# Altium PCB PCB1.PcbDoc (part 3 of 4)
Units mil, origin at the board's own origin, x right, y up, seen from the top; angles counter-clockwise.
Board outline 4724.41 x 4724.41 mil, 4 copper layers (Top Layer, GND, VCC, Bottom Layer); 291 components, 240 nets, 990 pads, 328 vias.
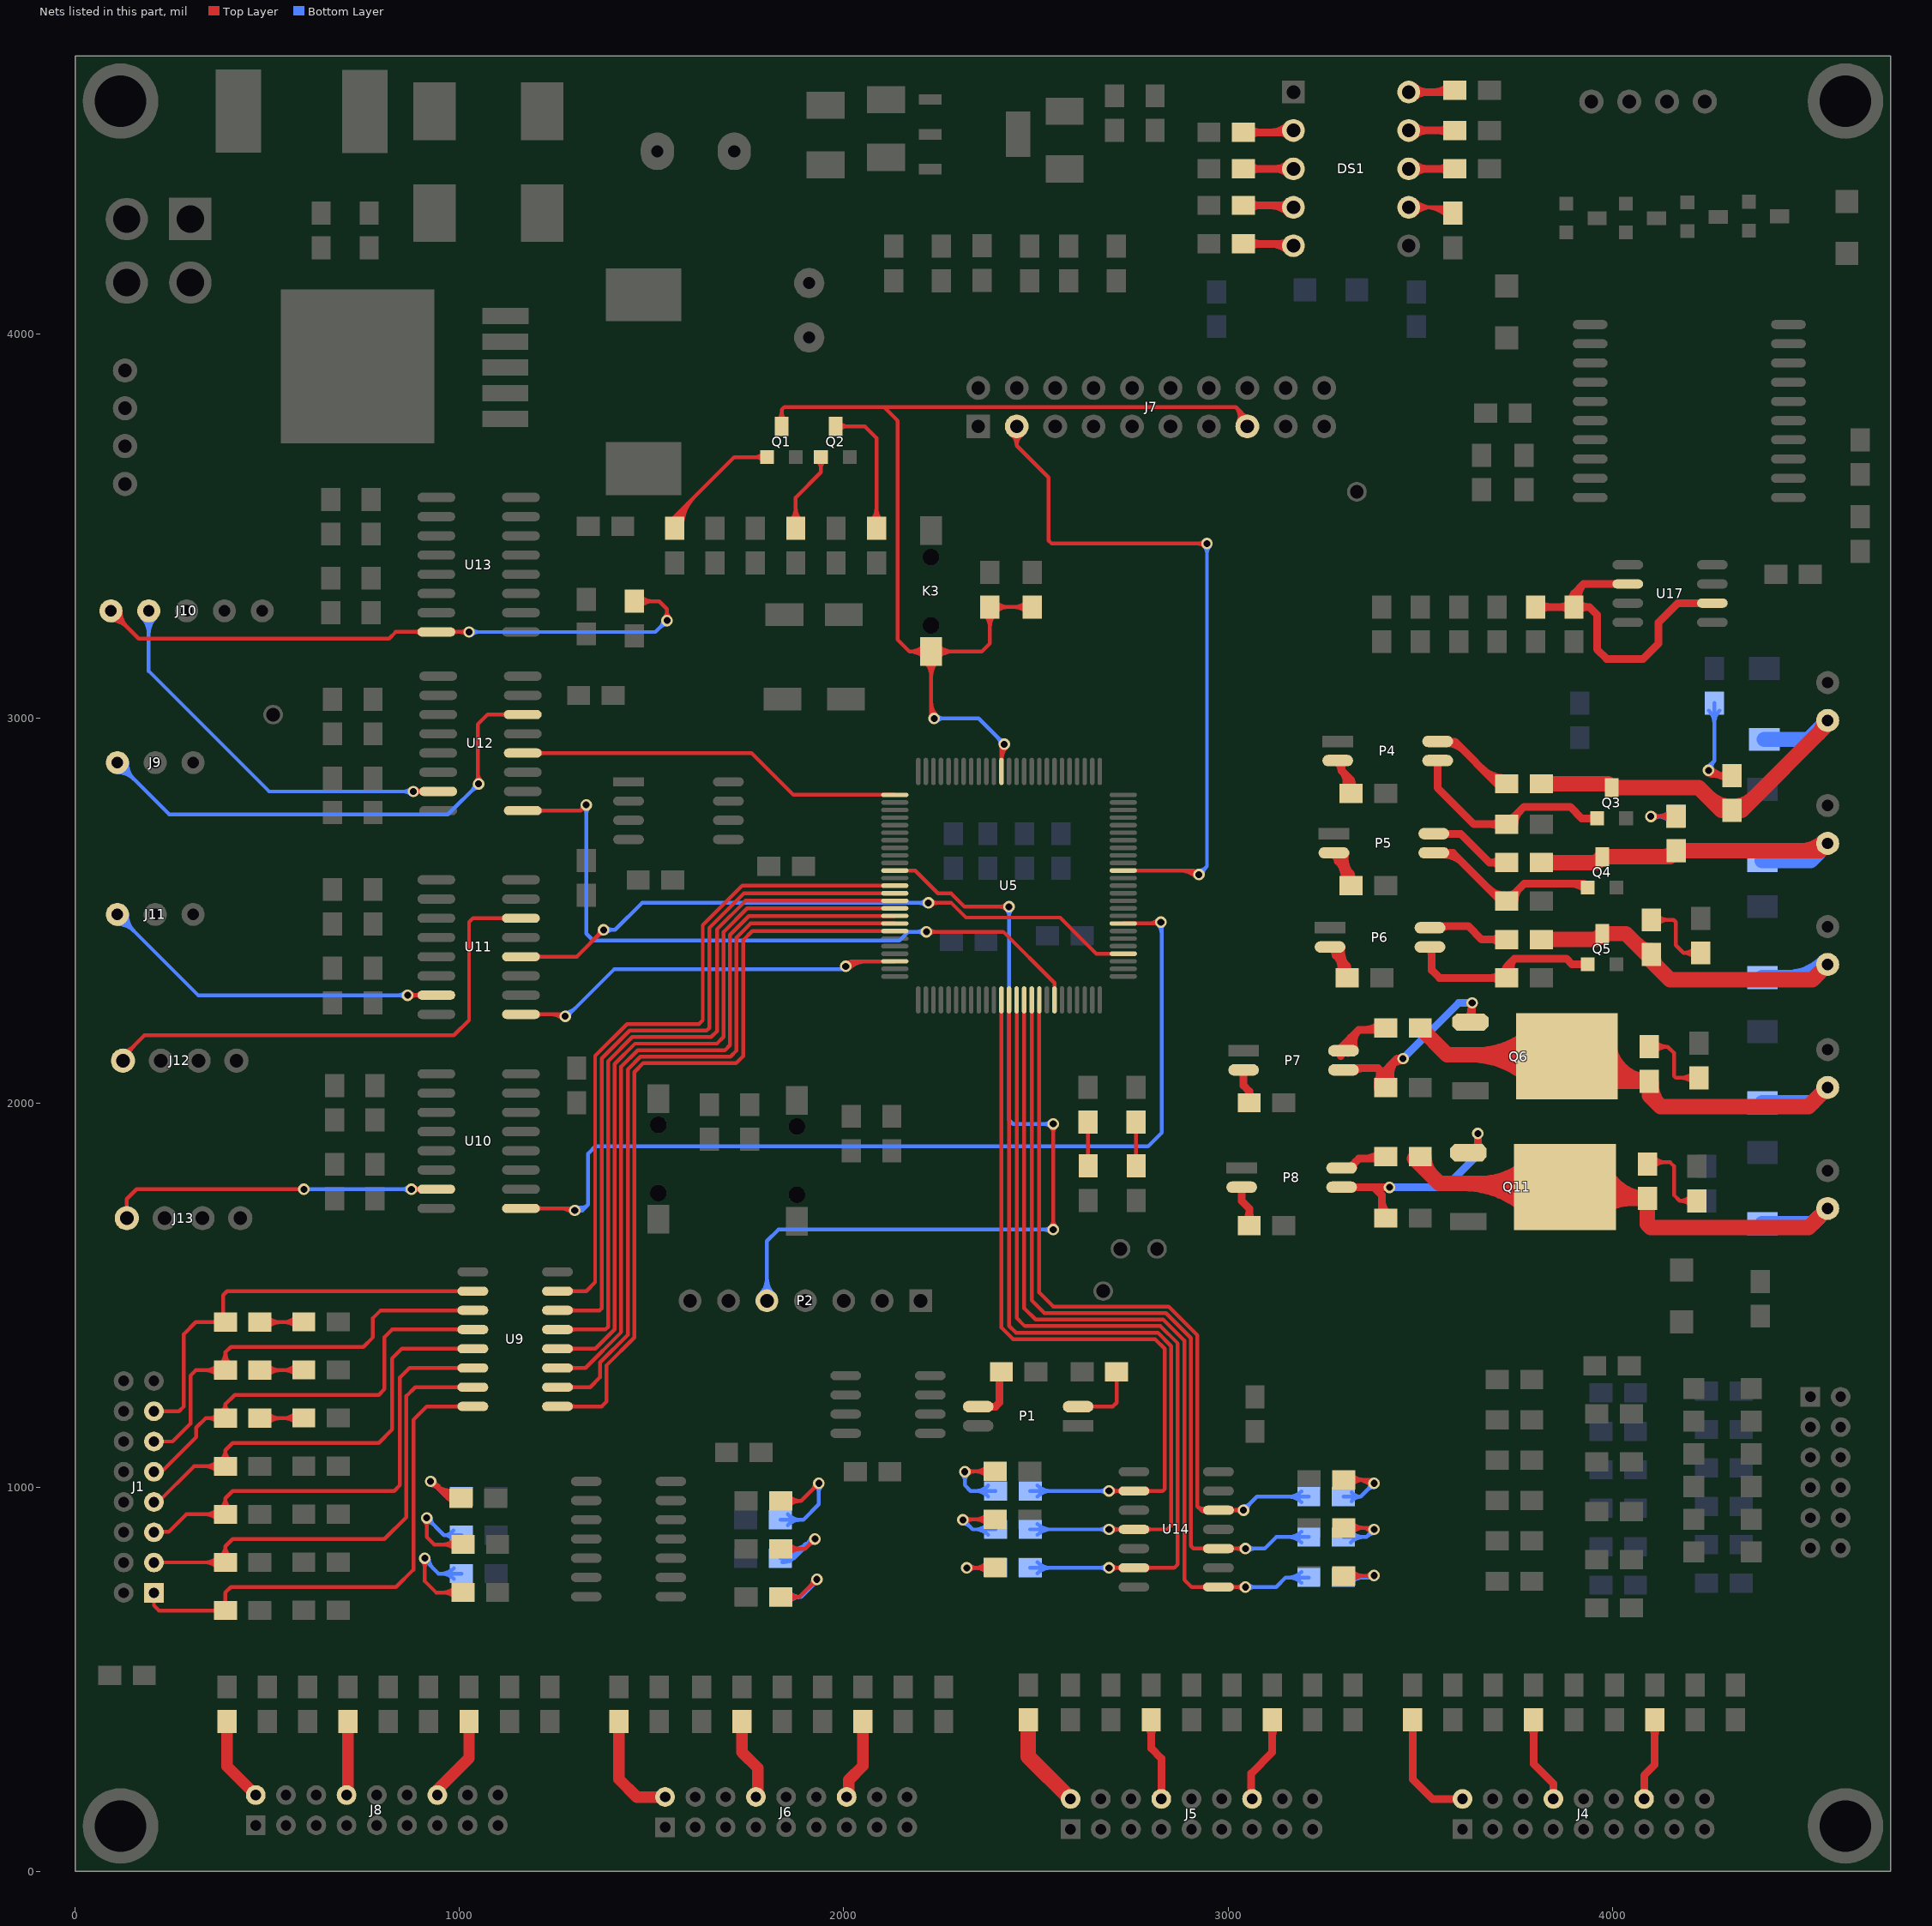
[diagram p5: the nets of this part, all layers, seen from the top]

## Via types
v1: diameter 30, hole 18, Top Layer to Bottom Layer, 301 vias
v2: diameter 35, hole 18, Top Layer to Bottom Layer, 22 vias
v3: diameter 50, hole 28, Top Layer to Bottom Layer, 4 vias
v4: diameter 28, hole 18, Top Layer to Bottom Layer, 1 vias

## Nets (pads, with @x,y where several pads share a name; then routed paths per layer and width w, separated by ;. In a path a pad name is that pad's centre, name@x,y a point inside that pad or via, vN(x,y) a via of type N, cw(c..) or ccw(c..) an arc to the next point about the centre after c; other vN are vias at no path point) (continued)
NetD19_1: D19.1 R53.1 | length 287.5
  Top Layer w10: D19.1@480.93,1179.09 594.09,1179.09 R53.1@595,1180 ; D19.1@500.07,1164.94 cw(c534.21,1130.8) 534.21,1179.09 cw(c534.21,1227.37) D19.1@500.07,1193.23 ; 539.51,1179.09 ccw(c539.51,1230.49) R53.1@575.86,1194.14 ; 543.92,1179.09 cw(c543.92,1133.92) R53.1@575.86,1165.86 ; 563.65,1179.09 ccw(c563.65,1206.35) R53.1@582.93,1187.07
NetD20_1: D20.1 R54.1 | length 287.5
  Top Layer w10: D20.1@480.93,1304.09 594.09,1304.09 R54.1@595,1305 ; D20.1@500.07,1289.94 cw(c534.21,1255.8) 534.21,1304.09 cw(c534.21,1352.37) D20.1@500.07,1318.23 ; 539.51,1304.09 ccw(c539.51,1355.49) R54.1@575.86,1319.14 ; 543.92,1304.09 cw(c543.92,1258.92) R54.1@575.86,1290.86 ; 563.65,1304.09 ccw(c563.65,1331.35) R54.1@582.93,1312.07
NetD21_1: D21.1 R55.1 | length 287.5
  Top Layer w10: D21.1@480.93,1429.09 594.09,1429.09 R55.1@595,1430 ; D21.1@500.07,1414.94 cw(c534.21,1380.8) 534.21,1429.09 cw(c534.21,1477.37) D21.1@500.07,1443.23 ; 539.51,1429.09 ccw(c539.51,1480.49) R55.1@575.86,1444.14 ; 543.92,1429.09 cw(c543.92,1383.92) R55.1@575.86,1415.86 ; 563.65,1429.09 ccw(c563.65,1456.35) R55.1@582.93,1437.07
NetD22_1: D22.1 R65.2 | length 414.4
  Top Layer w10: D22.1@3300.93,1019.09 3370.91,1019.09 v1(3380,1010) ccw(c3358.06,988.06) 3358.06,1019.09 ; D22.1@3320.07,1004.94 cw(c3354.21,970.8) 3354.21,1019.09 cw(c3354.21,1067.37) D22.1@3320.07,1033.23 ; 3333.92,1019.09 cw(c3333.92,963.92) v1@3372.93,1002.93
  Bottom Layer w10: R65.2@3300,975 3345,975 ; R65.2@3321,963 cw(c3345,945) 3345,975 ; R65.2@3321,987 ccw(c3345,1005) 3345,975 ; v1@3370,1010 cw(c3345.86,1010) 3362.93,992.93 cw(c3380,975.86) v1@3380,1000 ; v1(3380,1010) 3345,975
NetD23_1: D23.1 R66.2 | length 388.6
  Top Layer w10: D23.1@3300.93,894.09 3375.91,894.09 v1(3380,890) ; D23.1@3320.07,879.94 cw(c3354.21,845.8) 3354.21,894.09 cw(c3354.21,942.37) D23.1@3320.07,908.23 ; 3345.99,894.09 cw(c3345.99,855.99) v1@3372.93,882.93
  Bottom Layer w10: R66.2@3300,870 3360,870 v1(3380,890) ; R66.2@3319.14,855.86 cw(c3353.28,821.72) 3353.28,870 cw(c3353.28,918.28) R66.2@3319.14,884.14 ; v1@3370,890 cw(c3345.86,890) 3362.93,872.93 cw(c3380,855.86) v1@3380,880
NetD24_1: D24.1 R67.2 | length 383.5
  Top Layer w10: D24.1@3300.93,769.09 3379.09,769.09 v1(3380,770) ; D24.1@3320.07,754.94 cw(c3354.21,720.8) 3354.21,769.09 cw(c3354.21,817.37) D24.1@3320.07,783.23 ; 3353.65,769.09 ccw(c3353.65,796.35) v1@3372.93,777.07 ; 3358.06,769.09 cw(c3358.06,748.06) v1@3372.93,762.93
  Bottom Layer w10: R67.2@3300,765 3375,765 v1(3380,770) ; R67.2@3319.14,750.86 cw(c3353.28,716.72) 3353.28,765 cw(c3353.28,813.28) R67.2@3319.14,779.14 ; 3343.79,765 ccw(c3343.79,806.21) v1@3372.93,777.07
NetD25_1: D25.1 R68.2 | length 398.4
  Top Layer w10: v1(2320,790) 2393.16,790 D25.1@2394.07,790.91 ; v1@2327.07,782.93 cw(c2344.14,765.86) 2344.14,790 cw(c2344.14,814.14) v1@2327.07,797.07 ; 2338.58,790 ccw(c2338.58,841.4) D25.1@2374.93,805.06 ; 2342.99,790 cw(c2342.99,744.84) D25.1@2374.93,776.77 ; 2362.72,790 ccw(c2362.72,817.26) D25.1@2382,797.98
  Bottom Layer w10: v1(2320,790) R68.2@2395,790 ; v1@2327.07,782.93 cw(c2344.14,765.86) 2344.14,790 cw(c2344.14,814.14) v1@2327.07,797.07 ; R68.2@2375.86,775.86 ccw(c2341.72,741.72) 2341.72,790 ccw(c2341.72,838.28) R68.2@2375.86,804.14
NetD26_1: D26.1 R69.2 | length 407.3
  Top Layer w10: v1(2310,915) 2310.91,915.91 D26.1@2394.07,915.91 ; v1@2317.07,907.93 cw(c2336.35,888.65) 2336.35,915.91 ; v1@2317.07,922.07 ccw(c2331.94,936.94) 2331.94,915.91 ; D26.1@2374.93,901.77 ccw(c2340.79,867.63) 2340.79,915.91 ccw(c2340.79,964.2) D26.1@2374.93,930.06
  Bottom Layer w10: v1@2310,905 cw(c2310,880.86) 2327.07,897.93 cw(c2344.14,915) v1@2320,915 ; v1(2310,915) 2335,890 R69.2@2395,890 ; R69.2@2375.86,875.86 ccw(c2341.72,841.72) 2341.72,890 ccw(c2341.72,938.28) R69.2@2375.86,904.14
NetD27_1: D27.1 R70.2 | length 428.2
  Top Layer w10: v1(2315,1040) 2315.91,1040.91 D27.1@2394.07,1040.91 ; v1@2322.07,1032.93 cw(c2341.35,1013.65) 2341.35,1040.91 ; v1@2322.07,1047.07 ccw(c2336.94,1061.94) 2336.94,1040.91 ; D27.1@2374.93,1026.77 ccw(c2340.79,992.63) 2340.79,1040.91 ccw(c2340.79,1089.2) D27.1@2374.93,1055.06
  Bottom Layer w10: v1@2307.93,1032.93 cw(c2290.86,1015.86) 2315,1015.86 cw(c2339.14,1015.86) v1@2322.07,1032.93 ; v1(2315,1040) 2315,1005 2330,990 R70.2@2395,990 ; R70.2@2375.86,975.86 ccw(c2341.72,941.72) 2341.72,990 ccw(c2341.72,1038.28) R70.2@2375.86,1004.14
NetD28_1: D28.1 R71.2 | length 516.9
  Top Layer w10: D28.1@1835.93,964.09 1889.09,964.09 ; D28.1@1855.1,949.97 cw(c1889.08,916.11) 1889.08,964.09 ; D28.1@1855.1,978.2 ccw(c1889.08,1012.06) 1889.08,964.09 ; v1@1925,1010 cw(c1900.86,1010) 1917.93,992.93 cw(c1935,975.86) v1@1935,1000 ; v1(1935,1010) 1889.09,964.09
  Bottom Layer w10: R71.2@1835,915 1895,915 1935,955 v1(1935,1010) ; R71.2@1854.14,900.86 cw(c1888.28,866.72) 1888.28,915 cw(c1888.28,963.28) R71.2@1854.14,929.14 ; v1@1927.93,1002.93 cw(c1910.86,985.86) 1935,985.86 cw(c1959.14,985.86) v1@1942.07,1002.93
NetD29_1: D29.1 R72.2 | length 676.7
  Top Layer w10: D29.1@1835.93,839.09 1899.09,839.09 v1(1925,865) ; D29.1@1855.07,824.94 cw(c1889.21,790.8) 1889.21,839.09 cw(c1889.21,887.37) D29.1@1855.07,853.23 ; v1@1915,865 cw(c1890.86,865) 1907.93,847.93 cw(c1925,830.86) v1@1925,855
  Bottom Layer w10: R72.2@1835,815 1870,815 ; R72.2@1839.42,805.02 ccw(c1841.93,848.44) 1872.68,817.68 ; R72.2@1840,815 ccw(c1843.65,878.26) 1888.46,833.46 ; R72.2@1840.58,824.98 ccw(c1845.37,908.09) 1904.23,849.23 ; R72.2@1841.15,834.97 ccw(c1847.08,937.91) v1@1920,865 ; R72.2@1858.46,807.31 cw(c1870,802.5) 1870,815 ; R72.2@1858.46,822.69 ccw(c1870,827.5) 1870,815 ; 1897.75,850.62 cw(c1915.88,822.56) v1@1922.9,855.22 ; 1899.39,844.39 cw(c1925,818.79) v1@1925,855 ; 1908.75,857.73 ccw(c1900.68,870.22) v1@1915.22,867.1 ; 1911.46,856.46 ccw(c1902.93,865) v1@1915,865 ; v1(1925,865) v1@1920,865 ; 1870,815 v1@1920,865
NetD30_1: D30.1 R73.2 | length 444
  Top Layer w10: D30.1@1835.93,714.09 1884.09,714.09 ; D30.1@1856.19,701.16 cw(c1884.08,677.53) 1884.08,714.09 ; D30.1@1856.19,727.01 ccw(c1884.08,750.65) 1884.08,714.09 ; v1@1920,760 cw(c1895.86,760) 1912.93,742.93 cw(c1930,725.86) v1@1930,750 ; v1(1930,760) 1884.09,714.09
  Bottom Layer w10: R73.2@1835.93,714.09 1889.09,714.09 ; R73.2@1855.1,699.97 cw(c1889.08,666.11) 1889.08,714.09 ; R73.2@1855.1,728.2 ccw(c1889.08,762.06) 1889.08,714.09 ; 1909.39,734.39 ccw(c1883.79,760) v1@1920,760 ; 1921.46,746.46 cw(c1930,737.93) v1@1930,750 ; v1(1930,760) 1930,755 1889.09,714.09
NetD31_1: D31.1 R74.2 | length 518.2
  Top Layer w10: v1@902.93,807.93 cw(c885.86,790.86) 910,790.86 cw(c934.14,790.86) v1@917.07,807.93 ; v1(910,815) 910,755 939.09,725.91 D31.1@1014.07,725.91 ; D31.1@989.93,711.77 ccw(c955.79,677.63) 955.79,725.91 ccw(c955.79,774.2) D31.1@989.93,740.06
  Bottom Layer w10: v1@910,805 cw(c910,792.93) 918.54,801.46 ; v1(910,815) 910,810 945,775 R74.2@1005,775 ; v1@920,815 ccw(c956.21,815) 930.61,789.39 ; R74.2@985.86,760.86 ccw(c951.72,726.72) 951.72,775 ccw(c951.72,823.28) R74.2@985.86,789.14
NetD32_1: D32.1 R75.2 | length 467.9
  Top Layer w10: v1@907.93,912.93 cw(c890.86,895.86) 915,895.86 cw(c939.14,895.86) v1@922.07,912.93 ; v1(915,920) 915,870 934.09,850.91 D32.1@1009.07,850.91 ; D32.1@989.93,836.77 ccw(c955.79,802.63) 955.79,850.91 ccw(c955.79,899.2) D32.1@989.93,865.06
  Bottom Layer w10: v1@915,910 cw(c915,885.86) 932.07,902.93 cw(c949.14,920) v1@925,920 ; v1(915,920) 960,875 ; R75.2@984,863 ccw(c960,845) 960,875 ; R75.2@984,887 cw(c960,905) 960,875 ; R75.2@1005,875 960,875
NetD33_1: D33.1 R76.2 | length 607
  Top Layer w10: v1@925,1005 cw(c925,980.86) 942.07,997.93 cw(c959.14,1015) v1@935,1015 ; v1@927.59,1005.34 cw(c933.84,982.02) 945.91,1002.93 cw(c957.98,1023.84) v1@934.66,1017.59 ; 939.34,1000.66 ccw(c988.66,1049.98) D33.1@997.77,980.83 ; 953.68,986.32 ccw(c992,1024.64) D33.1@999.07,970.91 ; 968.02,971.98 ccw(c995.33,999.3) D33.1@1000.38,961 ; D33.1@980.61,963.23 ccw(c969.09,958.44) 969.09,970.91 ; D33.1@980.61,978.6 cw(c969.09,983.39) 969.09,970.91 ; D33.1@996.46,990.74 cw(c985.32,1075.32) v1(925,1015) 969.09,970.91 ; D33.1@1004.07,970.91 969.09,970.91
  Bottom Layer w10: v1@925,1005 cw(c925,980.86) 942.07,997.93 cw(c959.14,1015) v1@935,1015 ; v1(925,1015) 965,975 ; R76.2@982.77,964.85 ccw(c965,954.38) 965,975 ; R76.2@982.77,985.15 cw(c965,995.62) 965,975 ; R76.2@1005,975 965,975
NetD34_1: D34.1 R85.2 | length 639.5
  Top Layer w10: v1@4242.93,2857.93 ccw(c4259.83,2874.83) 4259.83,2850.93 ; v1@4251.45,2855.11 cw(c4253.61,2840.47) 4264.07,2850.93 ; v1@4257.07,2872.07 ccw(c4308.11,2923.11) D34.1@4308.11,2850.93 ; v1@4259.66,2867.57 ccw(c4288.42,2875.2) 4280.72,2846.47 ; v1@4259.89,2863.55 ccw(c4274.53,2861.39) 4264.07,2850.93 ; 4270.63,2849.17 cw(c4279.42,2881.98) v1(4250,2865) ; 4283.97,2850.93 cw(c4283.97,2898.97) v1(4250,2865) ; D34.1@4296.47,2837.1 ccw(c4264.07,2806.08) 4264.07,2850.93 ; D34.1@4296.47,2864.76 cw(c4264.07,2895.78) 4264.07,2850.93 ; D34.1@4310.91,2850.93 4264.07,2850.93 ; v1(4250,2865) ccw(c4269.16,2870.09) 4264.03,2850.94 ; v1(4250,2865) 4264.07,2850.93
  Bottom Layer w10: v1(4250,2865) 4250,2875 4265,2890 ; R85.2@4250.86,3020.86 cw(c4216.72,2986.72) 4265,2986.72 cw(c4313.28,2986.72) R85.2@4279.14,3020.86 ; v1@4259.55,2867.96 cw(c4280.53,2874.47) 4265,2890 ; R85.2@4265,3040 4265,2890
NetD34_2: D34.2 D39.A J14.2 Q3.3 R81.2 | length 1236
  Top Layer w40: R81.2@3815,2830 3988.62,2830 Q3.3@3998.48,2820.14 4224.86,2820.14 4284.07,2760.93 D34.2@4310.91,2760.93 4335.93,2760.93 4560,2985 J14.2@4560,2995 ; 4248.02,2796.98 ccw(c4310.91,2859.88) 4310.91,2770.93 ccw(c4310.91,2855.46) 4370.69,2795.69 ; 4535.86,2960.86 ccw(c4501.72,2995) J14.2@4550,2995
  Bottom Layer w40: D39.A@4395.14,2945.48 4510.48,2945.48 J14.2@4560,2995
NetD35_1: D35.1 R86.2 | length 358.8
  Top Layer w10: v1(4100,2745) 4100.93,2745.93 D35.1@4165.91,2745.93 ; v1@4107.07,2737.93 cw(c4126.39,2718.61) 4126.39,2745.93 ; v1@4107.07,2752.07 ccw(c4121.9,2766.9) 4121.9,2745.93 ; D35.1@4151.77,2731.79 ccw(c4117.63,2697.64) 4117.63,2745.93 ccw(c4117.63,2794.21) D35.1@4151.77,2760.07
  Bottom Layer w10: v1(4100,2745) R86.2@4165,2745 ; v1@4107.07,2737.93 cw(c4124.14,2720.86) 4124.14,2745 cw(c4124.14,2769.14) v1@4107.07,2752.07 ; R86.2@4150.86,2730.86 ccw(c4116.72,2696.72) 4116.72,2745 ccw(c4116.72,2793.28) R86.2@4150.86,2759.14
NetD35_2: D35.2 D40.A J15.2 Q4.3 R82.2 | length 1062.5
  Top Layer w40: R82.2@3815,2625 3958.34,2625 Q4.3@3973.48,2640.14 4150.13,2640.14 D35.2@4165.91,2655.93 4540.93,2655.93 J15.2@4560,2675 ; 4127.8,2640.14 ccw(c4127.8,2689.04) D35.2@4162.38,2654.46 ; 4489.82,2655.93 ccw(c4489.82,2745.18) J15.2@4552.93,2682.07
  Bottom Layer w40: D40.A@4390.14,2630.48 4515.48,2630.48 J15.2@4560,2675
NetD36_1: D36.1 R102.2 | length 331.2
  Top Layer w10: D36.1@4100.91,2475.93 4144.07,2475.93 ; D36.1@4116.17,2463 cw(c4144.07,2439.37) 4144.07,2475.93 ; D36.1@4116.17,2488.86 ccw(c4144.07,2512.49) 4144.07,2475.93 ; R102.2@4215.15,2376.6 ccw(c4185,2349.38) 4185,2390 ; R102.2@4215.15,2403.4 cw(c4185,2430.62) 4185,2390 ; R102.2@4230,2390 4185,2390 ; 4144.07,2475.93 4159.07,2475.93 4165,2470 4165,2455 4165,2410 4185,2390
NetD36_2: D36.2 D41.A J16.2 Q5.3 R97.2 | length 1196.5
  Top Layer w40: R97.2@3815,2425 3958.34,2425 Q5.3@3973.48,2440.14 4034.86,2440.14 4089.07,2385.93 D36.2@4100.91,2385.93 4100.91,2369.09 4150,2320 4520,2320 J16.2@4560,2360 ; 4063.63,2411.37 ccw(c4100.91,2448.66) D36.2@4100.91,2395.93 ; D36.2@4105.91,2380.93 ccw(c4146.58,2380.93) 4117.82,2352.18
  Bottom Layer w40: D41.A@4390.14,2325.48 4525.48,2325.48 J16.2@4560,2360 ; 4452.52,2325.48 ccw(c4452.52,2467.48) J16.2@4552.93,2367.07
NetD37_1: D37.1 R103.2 | length 349.1
  Top Layer w10: D37.1@4095.91,2145.93 4144.07,2145.93 ; D37.1@4110.08,2131.81 cw(c4144.07,2097.96) 4144.07,2145.93 ; D37.1@4110.08,2160.04 ccw(c4144.07,2193.9) 4144.07,2145.93 ; R103.2@4210.86,2050.86 ccw(c4176.72,2016.72) 4176.72,2065 ccw(c4176.72,2113.28) R103.2@4210.86,2079.14 ; R103.2@4225,2065 4165,2065 4160,2070 4160,2130 4144.07,2145.93
NetD37_2: D37.2 D42.A J17.2 Q6.2 R98.2 | length 2382.2
  Top Layer w40: R98.2@3500,2195 3570,2125 3890,2125 3895,2120 3959.07,2055.93 D37.2@4095.91,2055.93 ; 3628.41,2125 cw(c3628.41,1888.03) Q6.2@3795.97,2055.59 ; 3647.72,2125 ccw(c3647.72,2334.66) Q6.2@3795.97,2186.41 ; 3724.97,2125 cw(c3724.97,1984.6) Q6.2@3824.25,2083.88 ; 3744.29,2125 ccw(c3744.29,2238.09) Q6.2@3824.25,2158.12 ; Q6.2@3913.61,2123.6 ccw(c3997.14,2141.33) Q6.2@3997.14,2055.93 ; Q6.2@3952.73,2131.9 ccw(c4046.52,2151.81) 4046.52,2055.93 ; Q6.2@3991.86,2140.21 ccw(c4095.91,2162.29) D37.2@4095.91,2055.93 ; D37.2@4100.91,2050.78 ccw(c4183.24,2048.25) 4125,1990 ; J17.2@4560,2040 4510,1990 4125,1990 ; D37.2@4095.91,2055.93 4095.91,2019.09 4125,1990
  Bottom Layer w40: D42.A@4390.14,2000.48 4520.48,2000.48 J17.2@4560,2040
NetD38_1: D38.1 R114.2 | length 381.4
  Top Layer w10: D38.1@4090.91,1840.93 4094.98,1845 4150,1845 4160,1835 4160,1760 4175,1745 ; D38.1@4097.98,1853 ccw(c4117.3,1872.31) 4117.3,1845 ; D38.1@4105.06,1831.79 cw(c4136.95,1799.89) 4136.95,1845 ; D38.1@4105.06,1860.07 ccw(c4141.44,1896.46) 4141.44,1845 ; R114.2@4205.15,1731.6 ccw(c4175,1704.38) 4175,1745 ; R114.2@4205.15,1758.4 cw(c4175,1785.62) 4175,1745 ; R114.2@4220,1745 4175,1745
NetD38_2: D38.2 D43.A J19.2 Q11.2 R112.2 | length 2264.6
  Top Layer w40: R112.2@3485,1855 3550,1790 3885,1790 3895,1780 3924.07,1750.93 D38.2@4090.91,1750.93 ; R112.2@3510,1860 ccw(c3582.43,1860) 3531.21,1808.79 ; 3611.34,1790 cw(c3611.34,1535.96) Q11.2@3790.97,1715.59 ; 3654.79,1790 ccw(c3654.79,1982.59) Q11.2@3790.97,1846.41 ; 3707.9,1790 cw(c3707.9,1632.53) Q11.2@3819.25,1743.88 ; Q11.2@3943.74,1803.66 ccw(c4027.42,1843.71) 4027.42,1750.93 ; Q11.2@3961.79,1715.59 cw(c4047.1,1630.28) 4047.1,1750.93 ; Q11.2@3979.82,1820.93 ccw(c4090.91,1874.08) D38.2@4090.91,1750.93 ; J19.2@4560,1725 4510,1675 4100,1675 4090.91,1684.09 D38.2@4090.91,1750.93
  Bottom Layer w40: D43.A@4390.14,1685.48 4520.48,1685.48 J19.2@4560,1725
NetD50_1: D50.1 R116.2 | length 114.4
  Top Layer w10: R116.2@2760,1950 2760,1836.84 D50.1@2760.91,1835.93
NetD51_1: D51.1 R117.2 | length 114.4
  Top Layer w10: R117.2@2635,1950 2635,1836.84 D51.1@2635.91,1835.93
NetDS1_2: DS1.2 R84.2 | length 263
  Top Layer w20: R84.2@3040,4525 3165,4525 DS1.2@3170,4530 ; R84.2@3055.61,4514.39 cw(c3081.21,4488.79) 3081.21,4525 cw(c3081.21,4561.21) R84.2@3055.61,4535.61 ; 3110.79,4525 ccw(c3110.79,4589.21) DS1.2@3156.19,4543.81 ; 3134.93,4525 cw(c3134.93,4494.93) DS1.2@3156.19,4516.19
NetDS1_3: DS1.3 R83.2 | length 260.9
  Top Layer w20: R83.2@3040,4430 DS1.3@3170,4430 ; R83.2@3055.61,4419.39 cw(c3081.21,4393.79) 3081.21,4430 cw(c3081.21,4466.21) R83.2@3055.61,4440.61 ; DS1.3@3156.19,4416.19 ccw(c3122.86,4382.86) 3122.86,4430 ccw(c3122.86,4477.14) DS1.3@3156.19,4443.81
NetDS1_4: DS1.4 R87.2 | length 263
  Top Layer w20: R87.2@3040,4335 3165,4335 DS1.4@3170,4330 ; R87.2@3055.61,4324.39 cw(c3081.21,4298.79) 3081.21,4335 cw(c3081.21,4371.21) R87.2@3055.61,4345.61 ; 3110.79,4335 cw(c3110.79,4270.79) DS1.4@3156.19,4316.19 ; 3134.93,4335 ccw(c3134.93,4365.07) DS1.4@3156.19,4343.81
NetDS1_5: DS1.5 R88.2 | length 263
  Top Layer w20: R88.2@3040,4235 3165,4235 DS1.5@3170,4230 ; R88.2@3055.61,4224.39 cw(c3081.21,4198.79) 3081.21,4235 cw(c3081.21,4271.21) R88.2@3055.61,4245.61 ; 3110.79,4235 cw(c3110.79,4170.79) DS1.5@3156.19,4216.19 ; 3134.93,4235 ccw(c3134.93,4265.07) DS1.5@3156.19,4243.81
NetDS1_7: DS1.7 R9.2 | length 417.8
  Top Layer w10: DS1.7@3470,4330 3570,4330 R9.2@3585,4315 ; DS1.7@3480.27,4319.73 cw(c3505.07,4294.93) 3505.07,4330 cw(c3505.07,4365.07) DS1.7@3480.27,4340.27 ; DS1.7@3487.34,4312.66 cw(c3529.21,4270.79) 3529.21,4330 cw(c3529.21,4389.21) DS1.7@3487.34,4347.34 ; 3512.57,4330 cw(c3512.57,4247.57) R9.2@3570.86,4305.86 ; 3536.72,4330 cw(c3536.72,4271.72) R9.2@3577.93,4312.93 ; R9.2@3570.86,4334.14 cw(c3560.86,4344.14) 3560.86,4330 cw(c3560.86,4295.86) R9.2@3585,4320
NetDS1_8: DS1.8 R89.2 | length 250.9
  Top Layer w20: DS1.8@3470,4430 R89.2@3590,4430 ; DS1.8@3483.81,4416.19 cw(c3517.14,4382.86) 3517.14,4430 cw(c3517.14,4477.14) DS1.8@3483.81,4443.81 ; R89.2@3574.39,4419.39 ccw(c3548.79,4393.79) 3548.79,4430 ccw(c3548.79,4466.21) R89.2@3574.39,4440.61
NetDS1_9: DS1.9 R90.2 | length 250.9
  Top Layer w20: DS1.9@3470,4530 R90.2@3590,4530 ; DS1.9@3483.81,4516.19 cw(c3517.14,4482.86) 3517.14,4530 cw(c3517.14,4577.14) DS1.9@3483.81,4543.81 ; R90.2@3574.39,4519.39 ccw(c3548.79,4493.79) 3548.79,4530 ccw(c3548.79,4566.21) R90.2@3574.39,4540.61
NetDS1_10: DS1.10 R91.2 | length 238
  Top Layer w20: DS1.10@3470,4630 3585,4630 R91.2@3590,4635 ; DS1.10@3483.81,4616.19 cw(c3517.14,4582.86) 3517.14,4630 cw(c3517.14,4677.14) DS1.10@3483.81,4643.81 ; 3536.72,4630 ccw(c3536.72,4683.28) R91.2@3574.39,4645.61
NetJ4_2: J4.2 R37.2 | length 313.3
  Top Layer w20: R37.2@3475,390 R37.2@3480,395 3480,240 3531.26,188.74 J4.2@3610,188.74
NetJ4_8: J4.8 R39.2 | length 284.4
  Top Layer w20: R39.2@3784.39,379.39 cw(c3758.79,353.79) 3795,353.79 cw(c3831.21,353.79) R39.2@3805.61,379.39 ; R39.2@3795,395 3795,280 3846.22,228.78 J4.8@3846.22,188.74
NetJ4_14: J4.14 R41.2 | length 274.6
  Top Layer w20: J4.14@4082.44,188.74 4082.44,250 4110,277.56 R41.2@4110,395 ; R41.2@4099.39,379.39 cw(c4073.79,353.79) 4110,353.79 cw(c4146.21,353.79) R41.2@4120.61,379.39
NetJ5_2: J5.2 R31.2 | length 251.8
  Top Layer w40: R31.2@2480,395 2480,298.74 J5.2@2590,188.74
NetJ5_8: J5.8 R33.2 | length 279
  Top Layer w20: R33.2@2789.39,379.39 cw(c2763.79,353.79) 2800,353.79 cw(c2836.21,353.79) R33.2@2810.61,379.39 ; R33.2@2800,395 2800,320 2826.22,293.78 J5.8@2826.22,188.74 J5.8@2821.22,188.74
NetJ5_14: J5.14 R35.2 | length 286.9
  Top Layer w20: J5.14@3062.44,188.74 3060,191.18 3060,255 3115,310 R35.2@3115,395 ; R35.2@3104.39,379.39 cw(c3078.79,353.79) 3115,353.79 cw(c3151.21,353.79) R35.2@3125.61,379.39
NetJ6_2: J6.2 R25.2 | length 289.2
  Top Layer w30: R25.2@1415,390 1415,240 1461.26,193.74 J6.2@1535,193.74
NetJ6_8: J6.8 R27.2 | length 215.4
  Top Layer w30: R27.2@1735,390 1735,310 1776.22,268.78 1776.22,198.74 J6.8@1771.22,193.74
NetJ6_14: J6.14 R29.2 | length 213.9
  Top Layer w30: J6.14@2007.44,193.74 2012.44,198.74 2012.44,237.44 2050,275 R29.2@2050,390
NetJ8_2: J8.2 R43.2 | length 222.3
  Top Layer w30: R43.2@395,390 395,273.74 J8.2@470,198.74
NetJ8_8: J8.8 R45.2 | length 196.3
  Top Layer w30: J8.8@710,198.74 R45.2@710,395
NetJ8_14: J8.14 R47.2 | length 211.8
  Top Layer w30: J8.14@942.44,212.44 1025,295 R47.2@1025,390
NetP1_2: P1.2 R23.1 | length 191.7
  Top Layer w10: P1.2@2609.69,1209.57 2699.57,1209.57 2710,1220 R23.1@2710,1300 R23.1@2705,1305
NetP1_3: P1.3 R118.2 | length 144.6
  Top Layer w20: P1.3@2349.69,1209.57 2394.57,1209.57 2405,1220 R118.2@2405,1305
NetP4_2: P4.2 R77.1 | length 281.3
  Top Layer w20: P4.2@3282.57,2886.25 cw(c3267.45,2863.22) 3295,2863.22 ; P4.2@3295,2890 3295,2865 ; R77.1@3301.99,2812.47 ccw(c3264.17,2834.17) 3295,2865 ; R77.1@3309.66,2815.86 ccw(c3286.67,2840) 3320,2840 ; 3313.48,2846.52 cw(c3287.66,2820.69) R77.1@3319.34,2802.51 ; R77.1@3320,2805 3320,2840 ; R77.1@3330.34,2815.86 cw(c3353.33,2840) 3320,2840 ; 3295,2865 3320,2840
NetP4_3: P4.3 Q3.1 R79.1 | length 699.9
  Top Layer w20: P4.3@3545,2890 3545,2820 3640,2725 R79.1@3725,2725 3770,2770 3890,2770 3919.86,2740.14 Q3.1@3960.48,2740.14 ; R79.1@3709.39,2714.39 ccw(c3683.79,2688.79) 3683.79,2725 ccw(c3683.79,2761.21) R79.1@3709.39,2735.61 ; R79.1@3730,2740 ccw(c3730,2764.14) R79.1@3747.07,2747.07 ; R79.1@3745,2725 cw(c3793.28,2725) 3759.14,2759.14 ; Q3.1@3954.82,2734.48 ccw(c3941.17,2720.83) 3941.17,2740.14 ccw(c3941.17,2759.46) Q3.1@3954.82,2745.8
NetP4_4: P4.4 R81.1 | length 366.4
  Top Layer w20: P4.4@3545,2940 3590,2940 3700,2830 R81.1@3725,2830 ; P4.4@3570.31,2935.43 cw(c3570.31,2876.86) 3611.73,2918.27 ; 3660.25,2869.75 ccw(c3720,2929.5) R81.1@3720,2845 ; 3694.39,2835.61 ccw(c3720,2861.21) R81.1@3720,2825
NetP5_2: P5.2 R78.1 | length 371.9
  Top Layer w20: P5.2@3273.28,2645.86 cw(c3265.26,2627.82) 3285,2627.82 ; P5.2@3285,2650 3285,2630 ; P5.2@3285.78,2654.15 ccw(c3320.61,2645.23) 3295.19,2619.81 ; R78.1@3300.6,2569.19 ccw(c3241.42,2586.42) 3285,2630 ; P5.2@3305.16,2649.19 ccw(c3360.11,2635.11) 3320,2595 ; 3308.9,2606.1 cw(c3278.44,2575.64) R78.1@3319.8,2563.6 ; R78.1@3311,2577 ccw(c3297.5,2595) 3320,2595 ; R78.1@3320,2565 3320,2595 ; R78.1@3329,2577 cw(c3342.5,2595) 3320,2595 ; 3285,2630 3320,2595
NetP5_3: P5.3 Q4.1 R80.1 | length 676.3
  Top Layer w20: P5.3@3535,2650 3585,2650 3710,2525 R80.1@3725,2525 3770,2570 3925.62,2570 Q4.1@3935.48,2560.14 ; P5.3@3560.31,2645.43 cw(c3560.31,2574.79) 3610.26,2624.74 ; 3677.32,2557.68 ccw(c3720,2600.36) R80.1@3720,2540 ; R80.1@3730,2540 ccw(c3730,2564.14) R80.1@3747.07,2547.07 ; R80.1@3745,2525 cw(c3793.28,2525) 3759.14,2559.14 ; 3892.37,2570 cw(c3892.37,2517.03) Q4.1@3929.82,2554.48
NetP5_4: P5.4 R82.1 | length 277.9
  Top Layer w20: P5.4@3535,2700 3605,2700 3680,2625 R82.1@3725,2625 ; R82.1@3709.39,2614.39 ccw(c3683.79,2588.79) 3683.79,2625 ccw(c3683.79,2661.21) R82.1@3709.39,2635.61
NetP6_2: P6.2 R92.1 | length 348.4
  Top Layer w20: P6.2@3275.63,2408.46 ccw(c3304.95,2402.4) 3283.78,2381.22 ; 3280,2382.54 cw(c3299.75,2382.54) P6.2@3292.22,2400.8 ; P6.2@3280,2410 3280,2385 ; R92.1@3291.09,2330.61 ccw(c3244.43,2349.42) 3280,2385 ; P6.2@3295.21,2404.41 ccw(c3348.41,2393.42) 3310,2355 ; R92.1@3301,2337 ccw(c3287.5,2355) 3310,2355 ; 3301.39,2363.61 cw(c3274.9,2337.13) R92.1@3309.64,2323.13 ; R92.1@3310,2325 3310,2355 ; R92.1@3319,2337 cw(c3332.5,2355) 3310,2355 ; 3280,2385 3310,2355
NetP6_3: P6.3 Q5.1 R95.1 | length 769.3
  Top Layer w20: P6.3@3521.78,2401.89 cw(c3501.93,2382.04) 3530,2382.04 ; P6.3@3530,2410 3530,2345 3550,2325 R95.1@3725,2325 ; R95.1@3709.39,2314.39 ccw(c3683.79,2288.79) 3683.79,2325 ccw(c3683.79,2361.21) R95.1@3709.39,2335.61 ; R95.1@3719.66,2335.86 ccw(c3696.67,2360) 3730,2360 ; R95.1@3725.99,2322.01 cw(c3748.5,2338.79) 3728.65,2358.65 ; R95.1@3730,2325 3730,2360 ; R95.1@3740.34,2335.86 cw(c3763.33,2360) 3730,2360 ; R95.1@3742.03,2333.97 cw(c3767.24,2352.76) 3745,2375 ; Q5.1@3929.82,2354.48 ccw(c3916.17,2340.83) 3916.17,2360.14 ccw(c3916.17,2379.46) Q5.1@3929.82,2365.8 ; Q5.1@3935.48,2360.14 3894.86,2360.14 3880,2375 3745,2375 ; 3730,2360 3745,2375
NetP6_4: P6.4 R97.1 | length 288.1
  Top Layer w20: P6.4@3530,2460 3625,2460 3660,2425 R97.1@3725,2425 ; P6.4@3553.85,2451.89 cw(c3573.43,2432.31) 3573.43,2460 ; R97.1@3709.39,2414.39 ccw(c3683.79,2388.79) 3683.79,2425 ccw(c3683.79,2461.21) R97.1@3709.39,2435.61
NetP7_2: P7.2 R93.1 | length 137.9
  Top Layer w20: P7.2@3040,2090 3040,2045 3055,2030 ; R93.1@3046,2012 ccw(c3032.5,2030) 3055,2030 ; R93.1@3055,2000 3055,2030 ; R93.1@3064,2012 cw(c3077.5,2030) 3055,2030
NetP7_3: P7.3 Q6.1 R96.1 | length 899.9
  Top Layer w20: P7.3@3290,2090 3390,2090 3395,2085 ; P7.3@3328.85,2081.89 cw(c3348.43,2062.31) 3348.43,2090 ; R96.1@3392.51,2029.07 cw(c3428.84,2046.72) 3400.28,2075.28 ; R96.1@3395,2045 3395,2070 ; R96.1@3410.5,2037.81 cw(c3455.57,2059.71) 3420.14,2095.14 ; R96.1@3412.92,2052.74 cw(c3433,2085) 3395,2085 ; 3420.86,2095.86 cw(c3455,2061.72) v1@3455,2110 ; R96.1@3428.49,2046.56 cw(c3482.3,2072.7) 3440,2115 ; v1(3455,2115) v1@3440,2115 ; Q6.1@3621.54,2218.84 ccw(c3589.04,2251.34) v1@3635,2251.34 ; v1@3630.67,2257.5 cw(c3613.59,2247.64) 3632.64,2242.53 ; v1(3635,2260) 3635,2224.49 Q6.1@3648.94,2210.55 ; 3395,2070 ccw(c3410.5,2070) 3407.7,2054.75 cw(c3410.5,2070) 3395,2070 ; 3395,2070 3395,2085 ; 3395,2070 v1@3440,2115
  Bottom Layer w20: v1(3455,2115) 3600,2260 v1(3635,2260)
NetP7_4: P7.4 R98.1 | length 296.1
  Top Layer w20: P7.4@3290,2140 3340,2190 ; P7.4@3293.16,2121.59 cw(c3315.41,2131.16) P7.4@3298.29,2148.29 ; P7.4@3311.54,2129.5 cw(c3344.57,2143.71) 3319.14,2169.14 ; P7.4@3329.91,2137.4 cw(c3373.74,2156.26) 3340,2190 ; 3356.72,2190 ccw(c3356.72,2243.28) R98.1@3394.39,2205.61 ; R98.1@3395,2190 3340,2190
NetP8_2: P8.2 R109.1 | length 165.2
  Top Layer w20: P8.2@3035,1780 3035,1745 3055,1725 R109.1@3055,1680 ; R109.1@3044.39,1690.61 ccw(c3018.79,1716.21) 3055,1716.21 ccw(c3091.21,1716.21) R109.1@3065.61,1690.61
NetP8_3: P8.3 Q11.1 R110.1 | length 682.6
  Top Layer w20: P8.3@3285,1780 3380,1780 ; R110.1@3400,1700 3400,1760 3380,1780 ; 3400,1748.28 ccw(c3453.28,1748.28) R110.1@3415.61,1710.61 ; v1(3420,1780) 3380,1780 ; Q11.1@3641.54,1878.84 ccw(c3621.11,1899.27) 3650,1899.27 ; Q11.1@3648.94,1870.55 3650,1871.61 v1(3650,1920) ; 3650,1901.09 ccw(c3681.47,1901.09) Q11.1@3659.22,1878.84
  Bottom Layer w20: v1(3420,1780) 3565,1780 3650,1865 v1(3650,1920)
NetP8_4: P8.4 R112.1 | length 181
  Top Layer w20: P8.4@3285,1830 3315,1830 3340,1855 R112.1@3395,1855 ; P8.4@3325.31,1830.43 cw(c3349.19,1830.43) 3332.31,1847.31 ; 3356.72,1855 ccw(c3356.72,1908.28) R112.1@3394.39,1870.61
NetQ1_1: Q1.1 R60.1 | length 611.6
  Top Layer w10: R60.1@1550,3500 cw(c1586.21,3500) 1560.61,3525.61 ; R60.1@1560,3495 1560,3525 1715.14,3680.14 Q1.1@1800.48,3680.14 ; R60.1@1560,3500 cw(c1620.36,3500) 1577.68,3542.68 ; R60.1@1570,3500 cw(c1654.5,3500) 1594.75,3559.75 ; R60.1@1580,3500 cw(c1688.64,3500) 1611.82,3576.82 ; Q1.1@1791.29,3670.95 ccw(c1769.09,3648.76) 1769.09,3680.14 ccw(c1769.09,3711.53) Q1.1@1791.29,3689.33
NetQ2_1: Q2.1 R61.1 | length 337.4
  Top Layer w10: R61.1@1860.86,3514.14 ccw(c1826.72,3548.28) 1875,3548.28 ccw(c1923.28,3548.28) R61.1@1889.14,3514.14 ; R61.1@1875,3495 1875,3575 1940.48,3640.48 Q2.1@1940.48,3680.14 ; Q2.1@1931.29,3670.95 cw(c1909.1,3648.76) 1940.48,3648.76 cw(c1971.86,3648.76) Q2.1@1949.67,3670.95
NetQ2_3: Q2.3 R64.2 | length 479.1
  Top Layer w10: Q2.3@1978.48,3760.14 2054.86,3760.14 2085,3730 R64.2@2085,3495 ; Q2.3@1987.67,3750.95 cw(c2009.86,3728.76) 2009.86,3760.14 cw(c2009.86,3791.53) Q2.3@1987.67,3769.33 ; R64.2@2070.86,3514.14 ccw(c2036.72,3548.28) 2085,3548.28 ccw(c2133.28,3548.28) R64.2@2099.14,3514.14
NetR111_1: R111.1 R113.2 U17.2 U17.6 | length 1150
  Top Layer w20: R113.2@3800,3290 R111.1@3900,3290 ; R113.2@3810.61,3279.39 cw(c3836.21,3253.79) 3836.21,3290 cw(c3836.21,3326.21) R113.2@3810.61,3300.61 ; R111.1@3889.39,3279.39 ccw(c3863.79,3253.79) 3863.79,3290 ccw(c3863.79,3326.21) R111.1@3889.39,3300.61 ; R111.1@3891,3307 ccw(c3877.5,3325) 3900,3325 ; R111.1@3895.31,3293.27 cw(c3926.16,3304.65) 3902.91,3327.91 ; R111.1@3909,3307 cw(c3922.5,3325) 3900,3325 ; R111.1@3910.61,3279.39 cw(c3936.21,3253.79) 3936.21,3290 cw(c3936.21,3326.21) R111.1@3910.61,3300.61 ; R111.1@3914.07,3300.19 cw(c3958.43,3316.56) 3925,3350 ; U17.2@4040,3350 3925,3350 ; U17.6@4260,3300 4170,3300 4120,3250 4120,3195 4080,3155 3985,3155 3960,3180 3960,3270 3940,3290 R111.1@3900,3290 ; R111.1@3900,3290 3900,3325 ; 3900,3325 3925,3350
NSRST: C2.2 J7.15 K3.2 Q1.3 R13.1 U5.14 | length 3834.1
  Top Layer w10: Q1.3@1829.29,3776.33 ccw(c1807.1,3798.53) 1838.48,3798.53 ccw(c1869.86,3798.53) Q1.3@1847.67,3776.33 ; Q1.3@1838.48,3760.14 1838.48,3803.48 1845,3810 2105,3810 ; K3.2@2210.77,3148.61 cw(c2170.92,3108.76) 2227.28,3108.76 cw(c2283.65,3108.76) K3.2@2243.79,3148.61 ; K3.2@2210.77,3157.66 ccw(c2170.92,3117.81) 2170.92,3174.17 ccw(c2170.92,3230.54) K3.2@2210.77,3190.68 ; K3.2@2217.85,3155.68 cw(c2195.06,3132.9) 2227.28,3132.9 cw(c2259.5,3132.9) K3.2@2236.72,3155.68 ; K3.2@2217.85,3164.74 ccw(c2195.06,3141.95) 2195.06,3174.17 ccw(c2195.06,3206.39) K3.2@2217.85,3183.61 ; 2227.28,3018.63 ccw(c2253.63,3018.63) v1(2235,3000) 2227.28,3007.72 K3.2@2227.28,3174.17 ; 2227.28,3042.77 ccw(c2277.77,3042.77) v1@2242.07,3007.07 ; K3.2@2236.72,3164.74 cw(c2259.5,3141.95) 2259.5,3174.17 cw(c2259.5,3206.39) K3.2@2236.72,3183.61 ; K3.2@2243.79,3157.66 cw(c2283.65,3117.81) 2283.65,3174.17 cw(c2283.65,3230.54) K3.2@2243.79,3190.68 ; R13.1@2365.86,3270.86 cw(c2331.72,3236.72) 2380,3236.72 cw(c2428.28,3236.72) R13.1@2394.14,3270.86 ; R13.1@2394.14,3275.86 cw(c2428.28,3241.72) 2428.28,3290 cw(c2428.28,3338.28) R13.1@2394.14,3304.14 ; U5.14@2410.31,2862.24 v1@2410.31,2925.32 ; U5.14@2410.32,2891.17 cw(c2459.43,2891.17) v1@2424.7,2925.9 ; 2410.31,2915.31 cw(c2435.29,2915.31) v1(2417.63,2932.97) ; C2.2@2475.86,3275.86 ccw(c2441.72,3241.72) 2441.72,3290 ccw(c2441.72,3338.28) C2.2@2475.86,3304.14 ; C2.2@2490,3290 R13.1@2380,3290 2380,3195 2359.17,3174.17 K3.2@2227.28,3174.17 ; J7.15@3026.58,3771.28 ccw(c2996.01,3786.01) 3020,3810 ; 3029.97,3800.03 cw(c3009.46,3779.53) J7.15@3035.59,3766.94 ; 3039.76,3790.24 ccw(c3050,3800.49) J7.15@3050,3786 ; 3039.93,3790.07 cw(c3022.91,3773.05) J7.15@3044.59,3762.6 ; J7.15@3050,3760 3050,3780 3020,3810 ; 2105,3810 3020,3810 ; 2105,3810 2140,3775 2140,3205 2170.83,3174.17 K3.2@2227.28,3174.17
  Bottom Layer w10: v1(2235,3000) 2350.6,3000 v1(2417.63,2932.97) ; v1@2242.07,2992.93 cw(c2259.14,2975.86) 2259.14,3000 cw(c2259.14,3024.14) v1@2242.07,3007.07 ; v1@2407.63,2932.97 ccw(c2383.49,2932.97) 2400.56,2950.04 ccw(c2417.63,2967.12) v1@2417.63,2942.97
NTRST: J7.3 U5.90 | length 2093.7
  Top Layer w10: J7.3@2435.07,3738.71 cw(c2414.93,3710) 2450,3710 ; J7.3@2450,3760 2450,3710 ; J7.3@2464.93,3738.71 ccw(c2485.07,3710) 2450,3710 ; U5.90@2727.24,2604.37 2910.63,2604.37 ; 2874.44,2604.37 cw(c2874.44,2544.44) v1@2916.82,2586.82 ; 2898.58,2604.37 cw(c2898.58,2568.58) v1(2923.89,2593.89) 2921.11,2593.89 2910.63,2604.37 ; v1@2913.95,2594.96 ccw(c2902.47,2596.2) 2910.63,2604.37 ; v1@2919.51,2602.88 cw(c2916.12,2609.86) 2910.63,2604.37 ; v1@2937.93,3447.93 ccw(c2920.86,3430.86) 2920.86,3455 ccw(c2920.86,3479.14) v1@2937.93,3462.07 ; v1(2945,3455) 2541,3455 2533,3463 2533,3627 2450,3710
  Bottom Layer w10: v1(2923.89,2593.89) 2945,2615 v1(2945,3455) ; v1@2923.89,2603.89 ccw(c2923.89,2628.03) 2940.96,2610.96 ccw(c2958.03,2593.89) v1@2933.89,2593.89 ; v1@2937.93,3447.93 cw(c2920.86,3430.86) 2945,3430.86 cw(c2969.14,3430.86) v1@2952.07,3447.93
OUT1: U5.44 U9.1 | length 2053.4
  Top Layer w10: U9.1@1255,1210 1370,1210 1383,1223 1383,1317.25 1455,1389.25 1455,2080 1478,2103 1720,2103 1738,2121 1738,2423 1761.89,2446.89 U5.44@2132.76,2446.89 ; U9.1@1287.95,1205.05 cw(c1299.9,1193.1) 1299.9,1210 cw(c1299.9,1226.9) U9.1@1287.95,1214.95
OUT2: U5.43 U9.2 | length 2003.4
  Top Layer w10: U9.2@1255,1260 1340,1260 1366,1286 1366,1324.29 1438,1396.29 1438,2087.04 1470.96,2120 1705,2120 1721,2136 1721,2430.04 1757.53,2466.57 U5.43@2132.76,2466.57 ; U9.2@1287.95,1255.05 cw(c1299.9,1243.1) 1299.9,1260 cw(c1299.9,1276.9) U9.2@1287.95,1264.95
OUT3: U5.42 U9.3 | length 1964.3
  Top Layer w10: U9.3@1255,1310 1327.67,1310 1421,1403.33 1421,2094.08 1463.92,2137 1691,2137 1704,2150 1704,2437.08 1753.18,2486.26 U5.42@2132.76,2486.26 ; U9.3@1287.95,1305.05 cw(c1299.9,1293.1) 1299.9,1310 cw(c1299.9,1326.9) U9.3@1287.95,1314.95
OUT4: U5.41 U9.4 | length 1943.6
  Top Layer w10: U9.4@1255,1360 1353.63,1360 1404,1410.37 1404,2101.12 1456.88,2154 1670,2154 1687,2171 1687,2444.12 1748.82,2505.94 U5.41@2132.76,2505.94 ; U9.4@1287.95,1355.05 cw(c1299.9,1343.1) 1299.9,1360 cw(c1299.9,1376.9) U9.4@1287.95,1364.95
OUT5: U5.40 U9.5 | length 1926.4
  Top Layer w10: U9.5@1255,1410 1379.58,1410 1387,1417.42 1387,2108.17 1449.83,2171 1655,2171 1670,2186 1670,2451.17 1744.46,2525.63 U5.40@2132.76,2525.63 ; U9.5@1287.95,1405.05 cw(c1299.9,1393.1) 1299.9,1410 cw(c1299.9,1426.9) U9.5@1287.95,1414.95
OUT6: U5.39 U9.6 | length 1887.2
  Top Layer w10: U9.6@1255,1460 1365,1460 1370,1465 1370,2115.21 1442.79,2188 1643,2188 1650,2195 1650,2455.21 1740.11,2545.32 U5.39@2132.76,2545.32 ; U9.6@1287.95,1455.05 cw(c1299.9,1443.1) 1299.9,1460 cw(c1299.9,1476.9) U9.6@1287.95,1464.95
OUT7: U5.38 U9.7 | length 1831.3
  Top Layer w10: U9.7@1255,1510 1330,1510 1353,1533 1353,2122.25 1435.75,2205 1623,2205 1633,2215 1633,2462.25 1735.75,2565 U5.38@2132.76,2565 ; U9.7@1287.95,1505.05 cw(c1299.9,1493.1) 1299.9,1510 cw(c1299.9,1526.9) U9.7@1287.95,1514.95
OUT_1: D14.2 J1.1 U9.16 | length 1376.6
  Top Layer w10: J1.1@205,725 205,691.75 217.66,679.09 D14.2@390.93,679.09 ; D14.2@386.84,675 D14.2@390.93,679.09 ; U9.16@1002.05,1205.05 ccw(c990.1,1193.1) 990.1,1210 ccw(c990.1,1226.9) U9.16@1002.05,1214.95 ; U9.16@1035,1210 915,1210 880,1175 880,785 835,740 405,740 390.93,725.93 D14.2@390.93,679.09
OUT_2: D16.2 J1.3 U9.15 | length 1390.6
  Top Layer w10: J1.3@205,803.74 205.35,804.09 D16.2@390.93,804.09 390.93,845.93 ; D16.2@371.79,789.94 ccw(c337.64,755.8) 337.64,804.09 ccw(c337.64,852.37) D16.2@371.79,818.23 ; D16.2@378.37,819.65 ccw(c357.16,845.93) 390.93,845.93 ; D16.2@403.49,819.65 cw(c424.7,845.93) 390.93,845.93 ; U9.15@1002.05,1255.05 ccw(c990.1,1243.1) 990.1,1260 ccw(c990.1,1276.9) U9.15@1002.05,1264.95 ; U9.15@1035,1260 885,1260 862,1237 862,922 805,865 410,865 390.93,845.93
OUT_3: D17.2 J1.5 U9.14 | length 1377.6
  Top Layer w10: J1.5@185,875 J1.5@196.49,875 ; J1.5@196.49,883.89 243.89,883.89 289.09,929.09 D17.2@390.93,929.09 390.93,970.93 ; D17.2@371.79,914.94 ccw(c337.64,880.8) 337.64,929.09 ccw(c337.64,977.37) D17.2@371.79,943.23 ; D17.2@378.37,944.65 ccw(c357.16,970.93) 390.93,970.93 ; D17.2@403.49,944.65 cw(c424.7,970.93) 390.93,970.93 ; U9.14@1002.05,1305.05 ccw(c990.1,1293.1) 990.1,1310 ccw(c990.1,1326.9) U9.14@1002.05,1314.95 ; U9.14@1035,1310 870,1310 845,1285 845,1005 830,990 410,990 390.93,970.93
OUT_4: D18.2 J1.7 U9.13 | length 1290.7
  Top Layer w10: J1.7@205,961.22 216.22,961.22 309.09,1054.09 D18.2@390.93,1054.09 390.93,1095.93 ; D18.2@371.79,1039.94 ccw(c337.64,1005.8) 337.64,1054.09 ccw(c337.64,1102.37) D18.2@371.79,1068.23 ; D18.2@378.37,1069.65 ccw(c357.16,1095.93) 390.93,1095.93 ; D18.2@403.49,1069.65 cw(c424.7,1095.93) 390.93,1095.93 ; U9.13@1002.05,1355.05 ccw(c990.1,1343.1) 990.1,1360 ccw(c990.1,1376.9) U9.13@1002.05,1364.95 ; U9.13@1035,1360 850,1360 825,1335 825,1150 790,1115 410,1115 390.93,1095.93
OUT_5: D19.2 J1.9 U9.12 | length 1220.3
  Top Layer w10: J1.9@205,1039.96 224.96,1039.96 315,1130 315,1155 339.09,1179.09 D19.2@390.93,1179.09 390.93,1215.93 ; D19.2@369.16,1168.19 ccw(c349.09,1155.16) 349.09,1179.09 ccw(c349.09,1203.02) D19.2@369.16,1189.98 ; D19.2@380.03,1195.86 ccw(c367,1215.93) 390.93,1215.93 ; D19.2@401.82,1195.86 cw(c414.86,1215.93) 390.93,1215.93 ; U9.12@1002.05,1405.05 ccw(c990.1,1393.1) 990.1,1410 ccw(c990.1,1426.9) U9.12@1002.05,1414.95 ; U9.12@1035,1410 825,1410 805,1390 805,1255 790,1240 415,1240 390.93,1215.93
OUT_6: D20.2 J1.11 U9.11 | length 1276.1
  Top Layer w10: J1.11@205,1118.7 253.7,1118.7 300,1165 300,1290 314.09,1304.09 D20.2@390.93,1304.09 390.93,1350.93 ; D20.2@371.79,1289.94 ccw(c337.64,1255.8) 337.64,1304.09 ccw(c337.64,1352.37) D20.2@371.79,1318.23 ; D20.2@377.1,1318.53 ccw(c346.08,1350.93) 390.93,1350.93 ; D20.2@404.76,1318.53 cw(c435.78,1350.93) 390.93,1350.93 ; U9.11@1002.05,1455.05 ccw(c990.1,1443.1) 990.1,1460 ccw(c990.1,1476.9) U9.11@1002.05,1464.95 ; U9.11@1035,1460 795,1460 775,1440 775,1390 750,1365 405,1365 390.93,1350.93
OUT_7: D21.2 J1.13 U9.10 | length 1098.6
  Top Layer w10: J1.13@205,1197.44 270.44,1197.44 283,1210 283,1321.16 283,1398 314.09,1429.09 D21.2@370,1429.09 ; D21.2@390.93,1429.09 385,1435.02 385,1500 395,1510 U9.10@1035,1510
RST: P2.5 U5.36 | length 2568.5
  Top Layer w10: U5.36@2132.76,2604.37 2185.63,2604.37 2245,2545 2279.04,2545 2314.04,2510 v1(2430,2510) ; v1@2422.93,2502.93 ccw(c2405.86,2485.86) 2405.86,2510 ccw(c2405.86,2534.14) v1@2422.93,2517.07 ; v1@2537.93,1677.07 ccw(c2520.86,1694.14) 2545,1694.14 ccw(c2569.14,1694.14) v1@2552.07,1677.07 ; v1@2537.93,1937.93 cw(c2520.86,1920.86) 2545,1920.86 cw(c2569.14,1920.86) v1@2552.07,1937.93 ; v1(2545,1670) v1(2545,1945)
  Bottom Layer w10: P2.5@1782.66,1502.34 ccw(c1740.79,1544.21) 1800,1544.21 ccw(c1859.21,1544.21) P2.5@1817.34,1502.34 ; P2.5@1789.73,1495.27 ccw(c1764.93,1520.07) 1800,1520.07 ccw(c1835.07,1520.07) P2.5@1810.27,1495.27 ; P2.5@1800,1485 1800,1640 1830,1670 v1(2545,1670) ; v1@2422.93,2502.93 cw(c2405.86,2485.86) 2430,2485.86 cw(c2454.14,2485.86) v1@2437.07,2502.93 ; v1(2430,2510) 2430,1955 2440,1945 v1@2540,1945 ; v1@2537.93,1662.93 ccw(c2520.86,1645.86) 2520.86,1670 ccw(c2520.86,1694.14) v1@2537.93,1677.07 ; v1@2537.93,1937.93 ccw(c2520.86,1920.86) 2520.86,1945 ccw(c2520.86,1969.14) v1@2537.93,1952.07
RTS: J10.1 R57.2 U13.8 | length 2051.9
  Top Layer w10: J10.1@93.15,3255 cw(c93.15,3194.64) 135.83,3237.32 cw(c178.5,3280) J10.1@118.15,3280 ; J10.1@93.15,3265 cw(c93.15,3228.79) 118.76,3254.39 cw(c144.36,3280) J10.1@108.15,3280 ; J10.1@93.15,3280 165.15,3208 817.04,3208 834.18,3225.14 U13.8@939.83,3225.14 1019.86,3225.14 1020,3225 v1(1025,3225) ; U13.8@897.67,3220.19 ccw(c885.72,3208.24) 885.72,3225.14 ccw(c885.72,3242.04) U13.8@897.67,3230.09 ; U13.8@981.99,3220.19 cw(c993.94,3208.24) 993.94,3225.14 cw(c993.94,3242.04) U13.8@981.99,3230.09 ; 1000.52,3225.14 cw(c1000.52,3200.52) v1@1017.93,3217.93 ; 1001.2,3225.14 ccw(c1001.2,3248.8) v1@1017.93,3232.07 ; R57.2@1455,3305 1520,3305 1540,3285 v1(1540,3255) ; R57.2@1469.14,3290.86 cw(c1503.28,3256.72) 1503.28,3305 cw(c1503.28,3353.28) R57.2@1469.14,3319.14 ; v1@1532.93,3262.07 ccw(c1515.86,3279.14) 1540,3279.14 ccw(c1564.14,3279.14) v1@1547.07,3262.07
  Bottom Layer w10: v1(1025,3225) 1510,3225 v1(1540,3255) ; v1@1032.07,3217.93 cw(c1049.14,3200.86) 1049.14,3225 cw(c1049.14,3249.14) v1@1032.07,3232.07 ; v1@1530,3255 cw(c1505.86,3255) 1522.93,3237.93 cw(c1540,3220.86) v1@1540,3245
RXD1: U5.69 U12.9 | length 2011.3
  Top Layer w10: U12.9@1164.83,2760.14 1315.14,2760.14 ; U12.9@1206.99,2755.19 cw(c1218.94,2743.24) 1218.94,2760.14 cw(c1218.94,2777.04) U12.9@1206.99,2765.09 ; v1@1320.05,2773.97 cw(c1303.07,2772.22) 1315.14,2760.14 ; v1@1328.97,2765.05 ccw(c1327.22,2748.07) 1315.14,2760.14 ; v1(1330,2775) 1315.14,2760.14 ; v1(2215,2445) 2415,2445 2548.11,2311.89 U5.69@2548.11,2267.76 ; v1@2222.07,2437.93 cw(c2239.14,2420.86) 2239.14,2445 cw(c2239.14,2469.14) v1@2222.07,2452.07
  Bottom Layer w10: v1@1322.93,2767.93 cw(c1305.86,2750.86) 1330,2750.86 cw(c1354.14,2750.86) v1@1337.07,2767.93 ; v1(1330,2775) 1330,2440 1348,2422 2145,2422 2168,2445 v1(2215,2445) ; v1@2207.93,2437.93 ccw(c2190.86,2420.86) 2190.86,2445 ccw(c2190.86,2469.14) v1@2207.93,2452.07
RXD2: U5.26 U12.12 | length 1039.6
  Top Layer w10: U12.12@1164.83,2910.14 1164.97,2910 1760,2910 1868.78,2801.22 U5.26@2132.76,2801.22 ; U12.12@1206.99,2905.19 cw(c1218.6,2893.58) 1218.6,2910 ; U12.12@1206.99,2915.09 ccw(c1219.28,2927.38) 1219.28,2910
RXD3: U5.48 U11.9 | length 1238.2
  Top Layer w10: U11.9@1159.83,2230.14 1269.86,2230.14 v1(1275,2225) ; U11.9@1201.99,2225.19 cw(c1213.94,2213.24) 1213.94,2230.14 cw(c1213.94,2247.04) U11.9@1201.99,2235.09 ; 1238.45,2230.14 cw(c1238.45,2188.45) v1@1267.93,2217.93 ; v1@2007,2364.8 ccw(c2009.46,2376.84) 2018.15,2368.15 ; v1@2012.07,2347.93 cw(c2060.89,2299.11) 2060.89,2368.15 ; v1@2014.8,2357 cw(c2026.84,2359.46) 2018.15,2368.15 ; 2036.75,2368.15 ccw(c2036.75,2323.25) v1(2005,2355) 2018.15,2368.15 ; U5.48@2132.76,2368.15 2018.15,2368.15
  Bottom Layer w10: v1@1275,2235 ccw(c1275,2271.21) 1300.61,2245.61 ; 1288.54,2233.54 ccw(c1297.07,2225) 1285,2225 1285,2230 1403,2348 1998,2348 v1(2005,2355)
RXD4: U5.79 U11.12 | length 1858.3
  Top Layer w10: U11.12@1159.83,2380.14 1305.14,2380.14 v1(1375,2450) ; U11.12@1201.99,2375.19 cw(c1213.94,2363.24) 1213.94,2380.14 cw(c1213.94,2397.04) U11.12@1201.99,2385.09 ; v1@1365,2450 cw(c1340.86,2450) 1357.93,2432.93 cw(c1375,2415.86) v1@1375,2440 ; v1(2220,2520) 2280,2520 2318,2482 2563,2482 2657.17,2387.83 U5.79@2727.24,2387.83 ; v1@2227.07,2512.93 cw(c2244.14,2495.86) 2244.14,2520 cw(c2244.14,2544.14) v1@2227.07,2527.07
  Bottom Layer w10: v1(1375,2450) 1405,2450 1475,2520 v1(2220,2520) ; v1@1382.07,2442.93 cw(c1399.14,2425.86) 1399.14,2450 cw(c1399.14,2474.14) v1@1382.07,2457.07 ; v1@2212.93,2512.93 ccw(c2195.86,2495.86) 2195.86,2520 ccw(c2195.86,2544.14) v1@2212.93,2527.07
RXD5: U5.83 U10.9 | length 2702.8
  Top Layer w10: U10.9@1159.83,1725.14 1294.86,1725.14 v1(1300,1720) ; U10.9@1201.99,1720.19 cw(c1213.94,1708.24) 1213.94,1725.14 cw(c1213.94,1742.04) U10.9@1201.99,1730.09 ; 1263.45,1725.14 cw(c1263.45,1683.45) v1@1292.93,1712.93 ; U5.83@2727.24,2466.57 2821.57,2466.57 v1(2825,2470) ; 2792.59,2466.57 ccw(c2792.59,2502.41) v1@2817.93,2477.07 ; 2809.13,2466.57 cw(c2809.13,2454.13) v1@2817.93,2462.93
  Bottom Layer w10: v1@1304.01,1729.16 ccw(c1315.23,1754.77) 1335,1735 ; v1@1308,1714 cw(c1320,1705) 1320,1720 ; v1@1308,1726 ccw(c1320,1735) 1320,1720 ; 1324.64,1724.64 cw(c1308.92,1740.37) v1(1300,1720) 1320,1720 ; v1@2817.93,2462.93 cw(c2796.03,2441.03) 2827,2441.03 ; v1(2825,2470) 2827,2468 2827,1922 2792.06,1887.06 1355.94,1887.06 1355,1888 1335,1868 1335,1735 ; 2827,2450.69 cw(c2844.31,2450.69) v1@2832.07,2462.93 ; 1320,1720 1335,1735
RXD_M1: J10.2 U12.7 | length 1293.8
  Top Layer w10: v1(880,2810) 880.14,2810.14 U12.7@944.83,2810.14 ; v1@887.07,2802.93 cw(c904.48,2785.52) U12.7@904.48,2810.14 ; v1@887.07,2817.07 ccw(c903.8,2833.8) U12.7@903.8,2810.14 ; U12.7@902.67,2805.19 ccw(c890.72,2793.24) 890.72,2810.14 ccw(c890.72,2827.04) U12.7@902.67,2815.09
  Bottom Layer w10: J10.2@173.9,3262.32 cw(c131.22,3219.64) 191.57,3219.64 cw(c251.93,3219.64) J10.2@209.25,3262.32 ; J10.2@180.97,3269.39 cw(c155.36,3243.79) 191.57,3243.79 cw(c227.79,3243.79) J10.2@202.18,3269.39 ; J10.2@191.57,3280 191.57,3123.43 505,2810 v1(880,2810) ; v1@872.93,2802.93 ccw(c855.86,2785.86) 855.86,2810 ccw(c855.86,2834.14) v1@872.93,2817.07
RXD_M2: J9.1 U12.14 | length 1566.2
  Top Layer w10: v1@1042.93,2837.07 ccw(c1030.69,2849.31) 1048,2849.31 ; 1048,2858.97 ccw(c1078.97,2858.97) v1@1057.07,2837.07 ; v1(1050,2830) 1048,2832 1048,2985 1073.14,3010.14 U12.14@1164.83,3010.14 ; U12.14@1122.67,3005.19 ccw(c1110.72,2993.24) 1110.72,3010.14 ccw(c1110.72,3027.04) U12.14@1122.67,3015.09
  Bottom Layer w10: J9.1@110,2860 cw(c110,2799.64) 152.68,2842.32 cw(c195.36,2885) J9.1@135,2885 ; J9.1@110,2870 cw(c110,2833.79) 135.61,2859.39 cw(c161.21,2885) J9.1@125,2885 ; J9.1@110,2885 245,2750 970,2750 v1(1050,2830) ; v1@1040,2830 cw(c1015.86,2830) 1032.93,2812.93 cw(c1050,2795.86) v1@1050,2820
RXD_M3: J11.1 U11.7 | length 1171
  Top Layer w10: v1(865,2280) 939.69,2280 U11.7@939.83,2280.14 ; v1@872.07,2272.93 cw(c889.14,2255.86) 889.14,2280 cw(c889.14,2304.14) v1@872.07,2287.07 ; 885.37,2280 ccw(c885.37,2297.38) U11.7@897.67,2285.09 ; 886.06,2280 cw(c886.06,2263.58) U11.7@897.67,2275.19
  Bottom Layer w10: J11.1@110,2465 cw(c110,2404.64) 152.68,2447.32 cw(c195.36,2490) J11.1@135,2490 ; J11.1@110,2475 cw(c110,2438.79) 135.61,2464.39 cw(c161.21,2490) J11.1@125,2490 ; J11.1@110,2490 320,2280 v1(865,2280) ; v1@857.93,2272.93 ccw(c840.86,2255.86) 840.86,2280 ccw(c840.86,2304.14) v1@857.93,2287.07
RXD_M4: J12.1 U11.14 | length 1532.8
  Top Layer w10: J12.1@110,2105 180.41,2175.41 985.41,2175.41 1025,2215 1025,2470 1035.14,2480.14 U11.14@1159.83,2480.14 ; J12.1@110,2120 ccw(c110,2156.21) 135.61,2130.61 ccw(c161.21,2105) J12.1@125,2105 ; J12.1@110,2130 ccw(c110,2190.36) 152.68,2147.68 ccw(c195.36,2105) J12.1@135,2105 ; U11.14@1117.67,2475.19 ccw(c1105.72,2463.24) 1105.72,2480.14 ccw(c1105.72,2497.04) U11.14@1117.67,2485.09
RXD_M5: J13.1 U10.7 | length 968.1
  Top Layer w10: J13.1@134.47,1699.8 134.47,1749.47 160,1775 v1(595,1775) ; v1(875,1775) 875.14,1775.14 U10.7@939.83,1775.14 ; v1@882.07,1767.93 cw(c899.48,1750.52) U10.7@899.48,1775.14 ; v1@882.07,1782.07 ccw(c898.8,1798.8) U10.7@898.8,1775.14 ; U10.7@897.67,1770.19 ccw(c885.72,1758.24) 885.72,1775.14 ccw(c885.72,1792.04) U10.7@897.67,1780.09
  Bottom Layer w10: v1(595,1775) v1(875,1775) ; v1@867.93,1767.93 ccw(c850.86,1750.86) 850.86,1775 ccw(c850.86,1799.14) v1@867.93,1782.07
SENS1: R65.1 U5.67 U14.12 | length 2223.3
  Top Layer w10: U5.67@2508.74,2267.76 2508.74,1506.26 2545,1470 2845.21,1470 2920,1395.21 2920,950 ; 2929.73,940.27 ccw(c2941.07,951.62) U14.12@2948.36,937.33 ; U14.12@2942.05,935.05 ccw(c2930.1,923.1) 2930.1,940 ccw(c2930.1,956.9) U14.12@2942.05,944.95 ; U14.12@2943.82,946.23 cw(c2934.5,964.5) 2920,950 ; U14.12@3007.95,935.05 cw(c3019.9,923.1) 3019.9,940 cw(c3019.9,956.9) U14.12@3007.95,944.95 ; v1@3032.93,932.93 ccw(c3015.86,915.86) 3015.86,940 ccw(c3015.86,964.14) v1@3032.93,947.07 ; v1(3040,940) U14.12@2975,940 2930,940 2920,950
  Bottom Layer w10: v1(3040,940) 3075,975 R65.1@3210,975 ; v1@3040,950 ccw(c3040,974.14) 3057.07,957.07 ccw(c3074.14,940) v1@3050,940 ; R65.1@3190.86,960.86 ccw(c3156.72,926.72) 3156.72,975 ccw(c3156.72,1023.28) R65.1@3190.86,989.14
SENS2: R66.1 U5.66 U14.10 | length 2311.6
  Top Layer w10: U5.66@2489.06,2267.76 2489.06,1485.94 2522,1453 2838.17,1453 2903,1388.17 2903,847 2910,840 U14.10@2975,840 3040,840 3045,845 v1(3045,840) ; U14.10@2942.05,835.05 ccw(c2930.1,823.1) 2930.1,840 ccw(c2930.1,856.9) U14.10@2942.05,844.95 ; U14.10@3007.95,835.05 cw(c3019.9,823.1) 3019.9,840 cw(c3019.9,856.9) U14.10@3007.95,844.95 ; v1@3037.93,832.93 ccw(c3020.86,815.86) 3020.86,840 ccw(c3020.86,864.14) v1@3037.93,847.07
  Bottom Layer w10: v1(3045,840) 3095,840 3125,870 R66.1@3210,870 ; v1@3052.07,832.93 cw(c3069.14,815.86) 3069.14,840 cw(c3069.14,864.14) v1@3052.07,847.07 ; R66.1@3190.86,855.86 ccw(c3156.72,821.72) 3156.72,870 ccw(c3156.72,918.28) R66.1@3190.86,884.14
SENS3: R67.1 U5.65 U14.8 | length 2422.9
  Top Layer w10: U5.65@2469.37,2267.76 2469.37,1465.63 2499,1436 2831.12,1436 2886,1381.12 2886,759 2905,740 U14.8@2975,740 v1(3045,740) ; U14.8@2942.05,735.05 ccw(c2930.1,723.1) 2930.1,740 ccw(c2930.1,756.9) U14.8@2942.05,744.95 ; U14.8@3007.95,735.05 cw(c3019.9,723.1) 3019.9,740 cw(c3019.9,756.9) U14.8@3007.95,744.95 ; v1@3037.93,732.93 ccw(c3020.86,715.86) 3020.86,740 ccw(c3020.86,764.14) v1@3037.93,747.07
  Bottom Layer w10: v1(3045,740) 3125,740 3150,765 R67.1@3210,765 ; v1@3052.07,732.93 cw(c3069.14,715.86) 3069.14,740 cw(c3069.14,764.14) v1@3052.07,747.07 ; R67.1@3190.86,750.86 ccw(c3156.72,716.72) 3156.72,765 ccw(c3156.72,813.28) R67.1@3190.86,779.14
SENS4: R68.1 U5.64 U14.6 | length 2441.8
  Top Layer w10: U5.64@2449.69,2267.76 2449.69,1440.32 2471,1419 2824.08,1419 2869,1374.08 2869,799 2860,790 U14.6@2755,790 v1(2690,790) ; v1@2697.07,782.93 cw(c2714.14,765.86) 2714.14,790 cw(c2714.14,814.14) v1@2697.07,797.07 ; U14.6@2722.05,785.05 ccw(c2710.1,773.1) 2710.1,790 ccw(c2710.1,806.9) U14.6@2722.05,794.95 ; U14.6@2787.95,785.05 cw(c2799.9,773.1) 2799.9,790 cw(c2799.9,806.9) U14.6@2787.95,794.95
  Bottom Layer w10: R68.1@2485,790 v1(2690,790) ; R68.1@2504.14,775.86 cw(c2538.28,741.72) 2538.28,790 cw(c2538.28,838.28) R68.1@2504.14,804.14 ; v1@2682.93,782.93 ccw(c2665.86,765.86) 2665.86,790 ccw(c2665.86,814.14) v1@2682.93,797.07
SENS5: R69.1 U5.63 U14.4 | length 2334.8
  Top Layer w10: U5.63@2430,2267.76 2430,1419.67 2447.67,1402 2817.04,1402 2852,1367.04 2852,900 2842,890 U14.4@2755,890 v1(2690,890) ; v1@2697.07,882.93 cw(c2714.14,865.86) 2714.14,890 cw(c2714.14,914.14) v1@2697.07,897.07 ; U14.4@2722.05,885.05 ccw(c2710.1,873.1) 2710.1,890 ccw(c2710.1,906.9) U14.4@2722.05,894.95 ; U14.4@2787.95,885.05 cw(c2799.9,873.1) 2799.9,890 cw(c2799.9,906.9) U14.4@2787.95,894.95
  Bottom Layer w10: R69.1@2485,890 v1(2690,890) ; R69.1@2504.14,875.86 cw(c2538.28,841.72) 2538.28,890 cw(c2538.28,938.28) R69.1@2504.14,904.14 ; v1@2682.93,882.93 ccw(c2665.86,865.86) 2665.86,890 ccw(c2665.86,914.14) v1@2682.93,897.07
SENS6: R70.1 U5.62 U14.2 | length 2221.9
  Top Layer w10: U5.62@2410.31,2267.76 2410.31,1415.32 2440.63,1385 2810,1385 2835,1360 2835,995 2830,990 U14.2@2755,990 v1(2690,990) ; v1@2697.07,982.93 cw(c2714.14,965.86) 2714.14,990 cw(c2714.14,1014.14) v1@2697.07,997.07 ; U14.2@2722.05,985.05 ccw(c2710.1,973.1) 2710.1,990 ccw(c2710.1,1006.9) U14.2@2722.05,994.95 ; U14.2@2787.95,985.05 cw(c2799.9,973.1) 2799.9,990 cw(c2799.9,1006.9) U14.2@2787.95,994.95
  Bottom Layer w10: R70.1@2485,990 v1(2690,990) ; R70.1@2504.14,975.86 cw(c2538.28,941.72) 2538.28,990 cw(c2538.28,1038.28) R70.1@2504.14,1004.14 ; v1@2682.93,982.93 ccw(c2665.86,965.86) 2665.86,990 ccw(c2665.86,1014.14) v1@2682.93,997.07